# Altium PCB PCB1.PcbDoc
Units mm, origin at the board's own origin, x right, y up, seen from the top; angles counter-clockwise.
Board outline 100 x 61.85 mm, 2 copper layers (Top Layer, Bottom Layer); 9 components, 20 nets, 97 pads, 0 vias.
Unrouted connection lines stored in the file: 51.
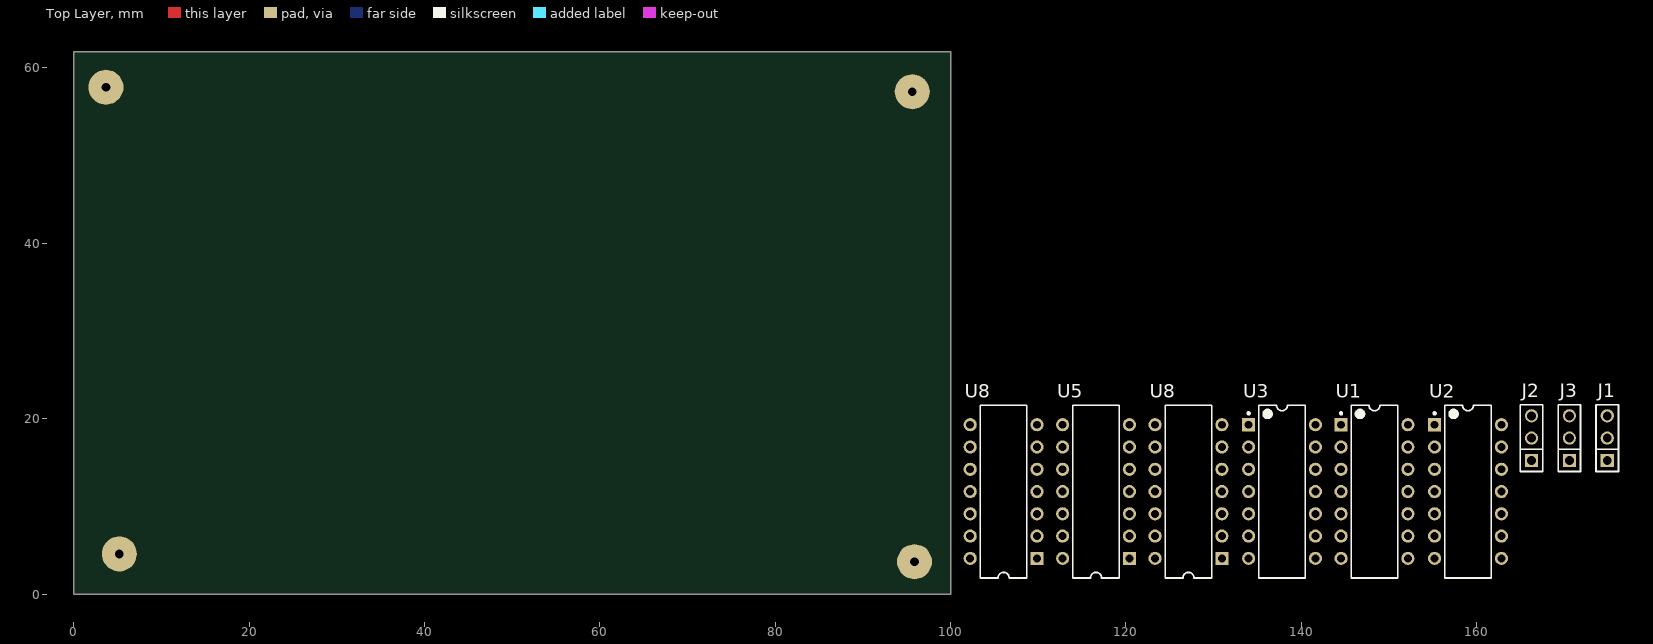
[diagram p0: Top Layer view]
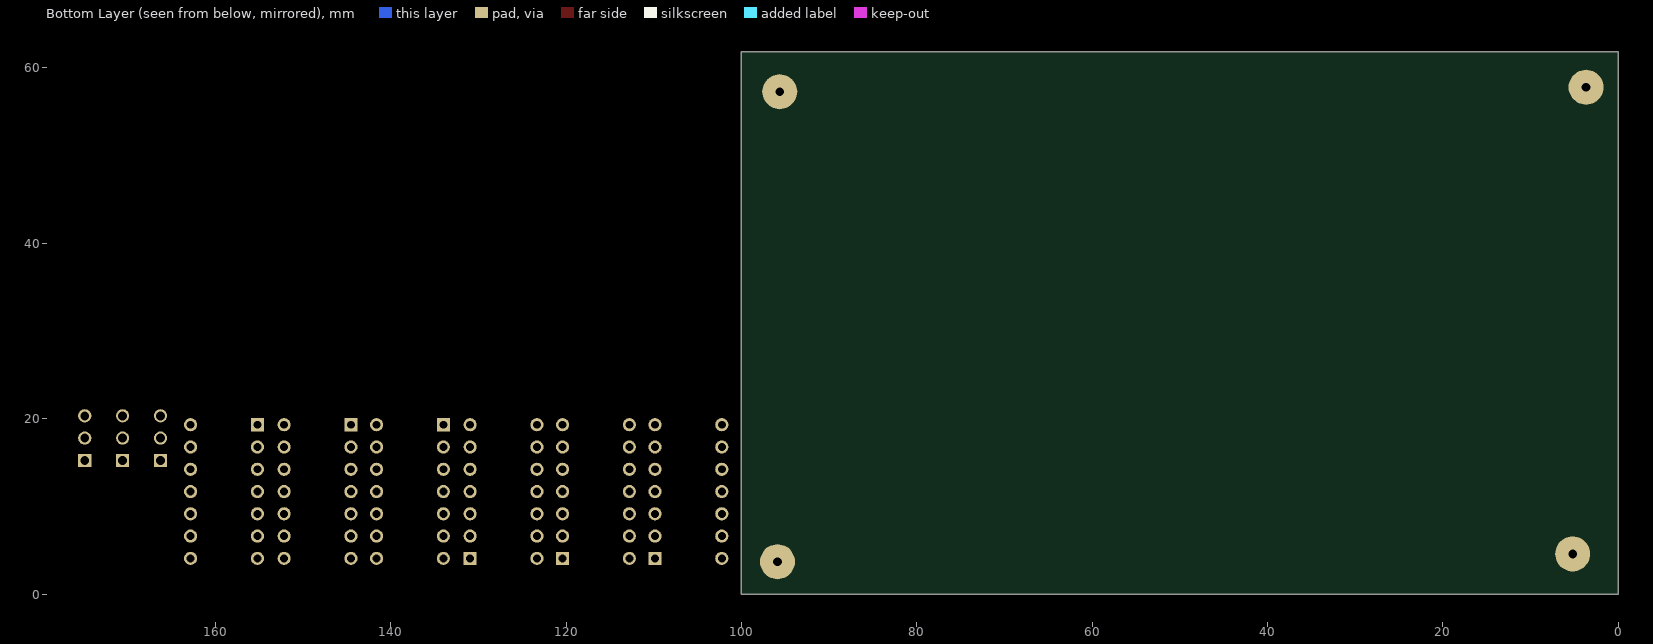
[diagram p1: Bottom Layer view, seen from below]

## Layer stack, top to bottom
Top Solder: solder mask 0.0102, Solder Resist, Dk 3.5
Top Layer: signal copper 0.0356
Dielectric 1: dielectric 0.32, FR-4, Dk 4.8
Bottom Layer: signal copper 0.0356
Bottom Solder: solder mask 0.0102, Solder Resist, Dk 3.5

## Board outline
0,0 100,0 100,61.849 0,61.849

## Design rules (kind name [scope] priority, off if disabled: settings)
Clearance [All] p1: gap=0.6
PolygonConnect [All] p1: connectstyle=Relief reliefconductorwidth=0.254 reliefentries=4 polygonreliefangle="90 Angle" airgapwidth=0.254
RoutingVias [All] p1: holewidth=1 width=2.5 viastyle="Through Hole" minholewidth=1 minwidth=2.5 maxholewidth=1 maxwidth=2.5
SolderMaskExpansion [All] p1: expansion=0.102
Width [All] p1: maxlimit=0.6 minlimit=0.6 preferedwidth=0.6
30 further rules are at their usual default settings.

## Classes and differential pairs
component class task5: J1 J2 J3 U1 U2 U3 U5 U8

## Components (designator, comment, footprint, x,y, rotation, side; value= is the part's Value field where it differs from the comment)
J1 "CON3" SIP3 174.879,17.78 r90 top
J2 "CON3" SIP3 166.243,17.78 r90 top
J3 "CON3" SIP3 170.561,17.78 r90 top
U1 "CD4013BCN" N14A 148.336,11.684 r0 top
U2 "CD4013BCN" N14A 159.004,11.684 r0 top
U3 "CD4013BCN" N14A 137.795,11.684 r0 top
U5 "MC74HC08AN" 646-06 116.586,11.684 r90 top
U8 "MC74HC32AN" 646-06 127.127,11.684 r90 top
U8 "MC74HC02AN" 646-06 106.045,11.684 r90 top

## Footprints (in the part's own frame and the unit in brackets; to place one, negate y for a bottom-side part, rotate by r counter-clockwise, add the part's x,y. Pads: shape width x height; smd on the part's side, far side on the other; paste and mask are expansions set on the pad)
646-06 [mm] "DIP; 14 Leads; Row Spacing 7.62 mm; Pitch 2.54 mm"
  rect 1.5x1.5 hole 0.9: 1(-7.62,-3.81)
  round 1.5 hole 0.9: 2(-5.08,-3.81) 3(-2.54,-3.81) 4(0,-3.81) 5(2.54,-3.81) 6(5.08,-3.81) 7(7.62,-3.81) 8(7.62,3.81) 9(5.08,3.81) 10(2.54,3.81) 11(0,3.81) 12(-2.54,3.81) 13(-5.08,3.81) 14(-7.62,3.81)
  silkscreen extent -9.85,-2.65 9.85,2.65
N14A [mm] "DIP, 14-Leads, Row Spacing 7.62mm, Pitch 2.54mm, Body 19.18x6.35mm"
  rect 1.5x1.5 hole 0.9: 1(-3.81,7.62)
  round 1.5 hole 0.9: 2(-3.81,5.08) 3(-3.81,2.54) 4(-3.81,0) 5(-3.81,-2.54) 6(-3.81,-5.08) 7(-3.81,-7.62) 8(3.81,-7.62) 9(3.81,-5.08) 10(3.81,-2.54) 11(3.81,0) 12(3.81,2.54) 13(3.81,5.08) 14(3.81,7.62)
  silkscreen extent -3.93,-9.85 2.65,9.85, body extent -3.55,-9.85 3.55,9.85, height 5.08
SIP3 [mm]
  rect 1.5x1.5 hole 1.016: 1(-2.54,0)
  round 1.5 hole 1.016: 2(0,0) 3(2.54,0)
  silkscreen extent -3.81,-1.27 3.81,1.27, body extent -3.81,-1.3 3.81,1.24, height 8.38

## Part data
U1 U2 U3: "Dual D-Type Flip-Flop"
U5: "Quad 2-Input AND Gate"
U8: "Quad 2-Input OR Gate"
U8: "Quad 2-Input NOR Gate"

## Free pads (board coordinates)
  round 4 hole 1: 1(95.631,57.277) 2(95.885,3.683) 3(5.207,4.572) 4(3.683,57.785)

## Nets (pads, with @x,y where several pads share a name; then routed paths per layer and width w, separated by ;. In a path a pad name is that pad's centre, name@x,y a point inside that pad or via, vN(x,y) a via of type N, cw(c..) or ccw(c..) an arc to the next point about the centre after c; other vN are vias at no path point)
CLK: J1.3 U2.11 U3.3 U3.11
GND: J1.1 U1.4 U1.6 U1.7 U1.8 U1.10 U2.4 U2.6 U2.7 U2.8 U2.10 U3.4 U3.6 U3.7 U3.8 U3.10 U5.7 U8.7
NetU1_2: U1.2 U1.5 U1.11
NetU1_9: U1.9 U1.12 U2.3
NetU2_2: U2.2 U2.5
NetU2_9: U2.9 U2.12
NetU3_9: U3.9 U8.3@130.937,9.144
NetU3_12: U3.12 U5.10
NetU5_3: U5.3 U5.5 U8.2@109.855,6.604 U8.3@109.855,9.144
NetU5_6: U5.6 U8.1@130.937,4.064
NetU5_8: U5.8 U8.2@130.937,6.604
NetU5_9: U5.9 U8.1@109.855,4.064
Q0: J2.1 U1.1
Q0B: J3.1 U2.13 U5.1
Q1: J2.2 U1.13
Q1B: J3.2 U3.1 U3.2 U3.5 U5.2
Q2: J2.3 U2.1
Q2B: J3.3 U3.13 U5.4
VCC: J1.2
VDD: U1.14 U2.14 U3.14 U5.14 U8.14
pads on no net: U1.3 U5.11 U5.12 U5.13 U8.4 U8.5 U8.6 U8.8 U8.9 U8.10 U8.11 U8.12 U8.13